# Altium PCB AMBIT-panel.PcbDoc
Units mil, origin at the board's own origin, x right, y up, seen from the top; angles counter-clockwise.
Board outline 4612.83 x 8609.74 mil, 4 copper layers (Top Layer, Ground Plane, Power Plane, Bottom Layer), stack 59.2 mil thick; 8 components, 0 nets, 12 pads, 0 vias.
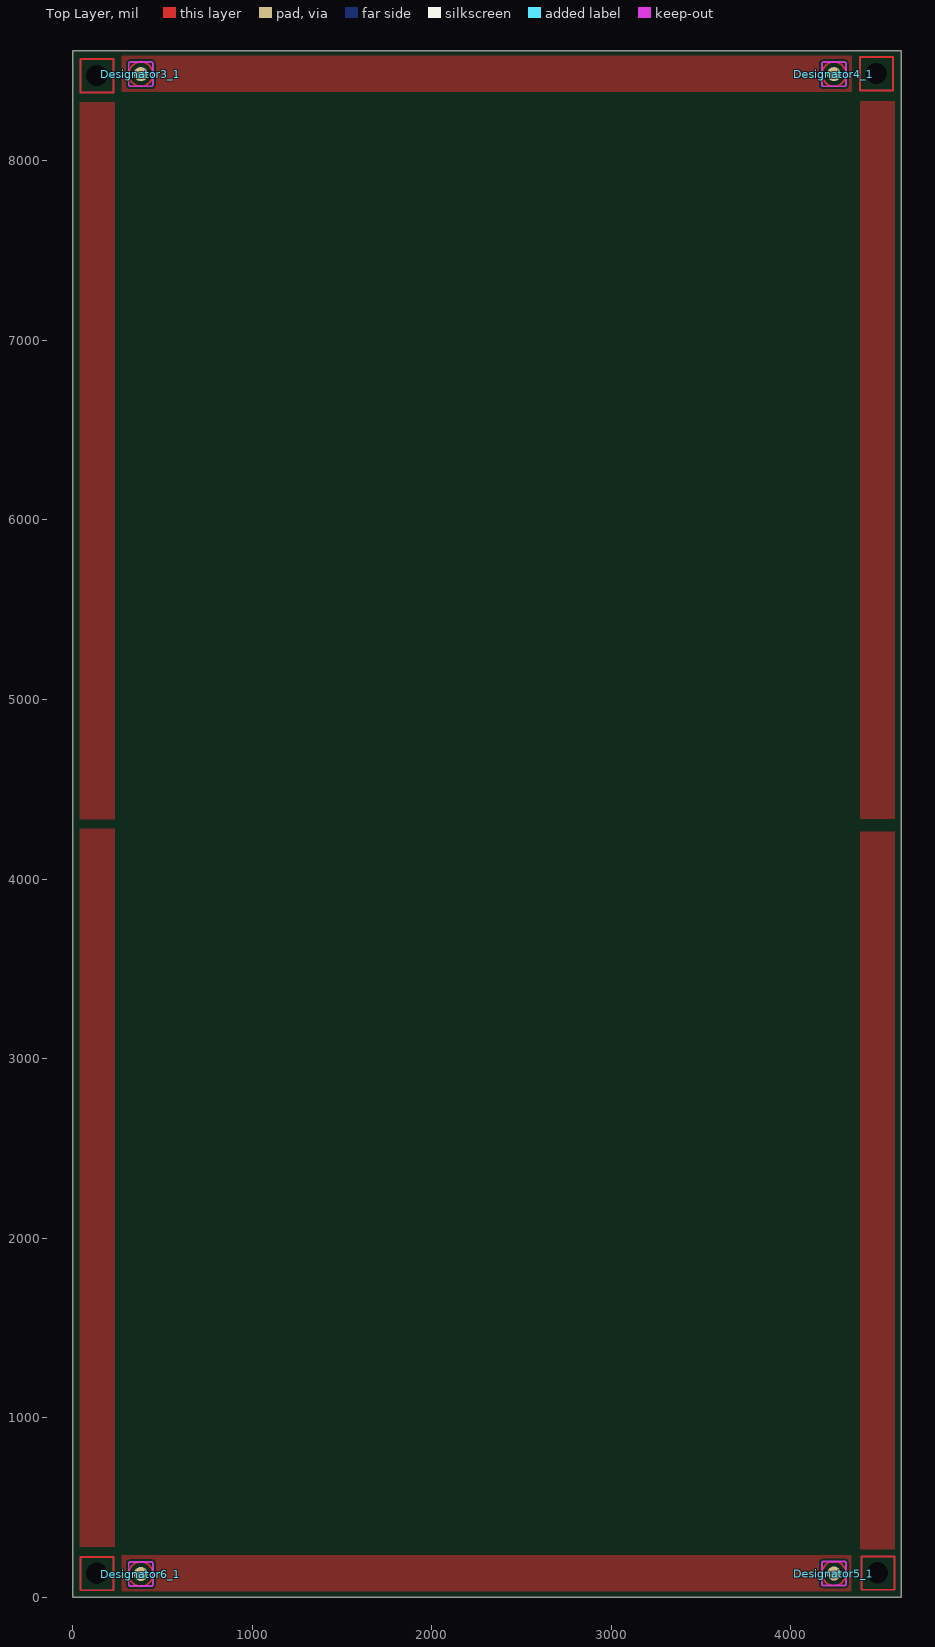
[diagram p0: Top Layer view]
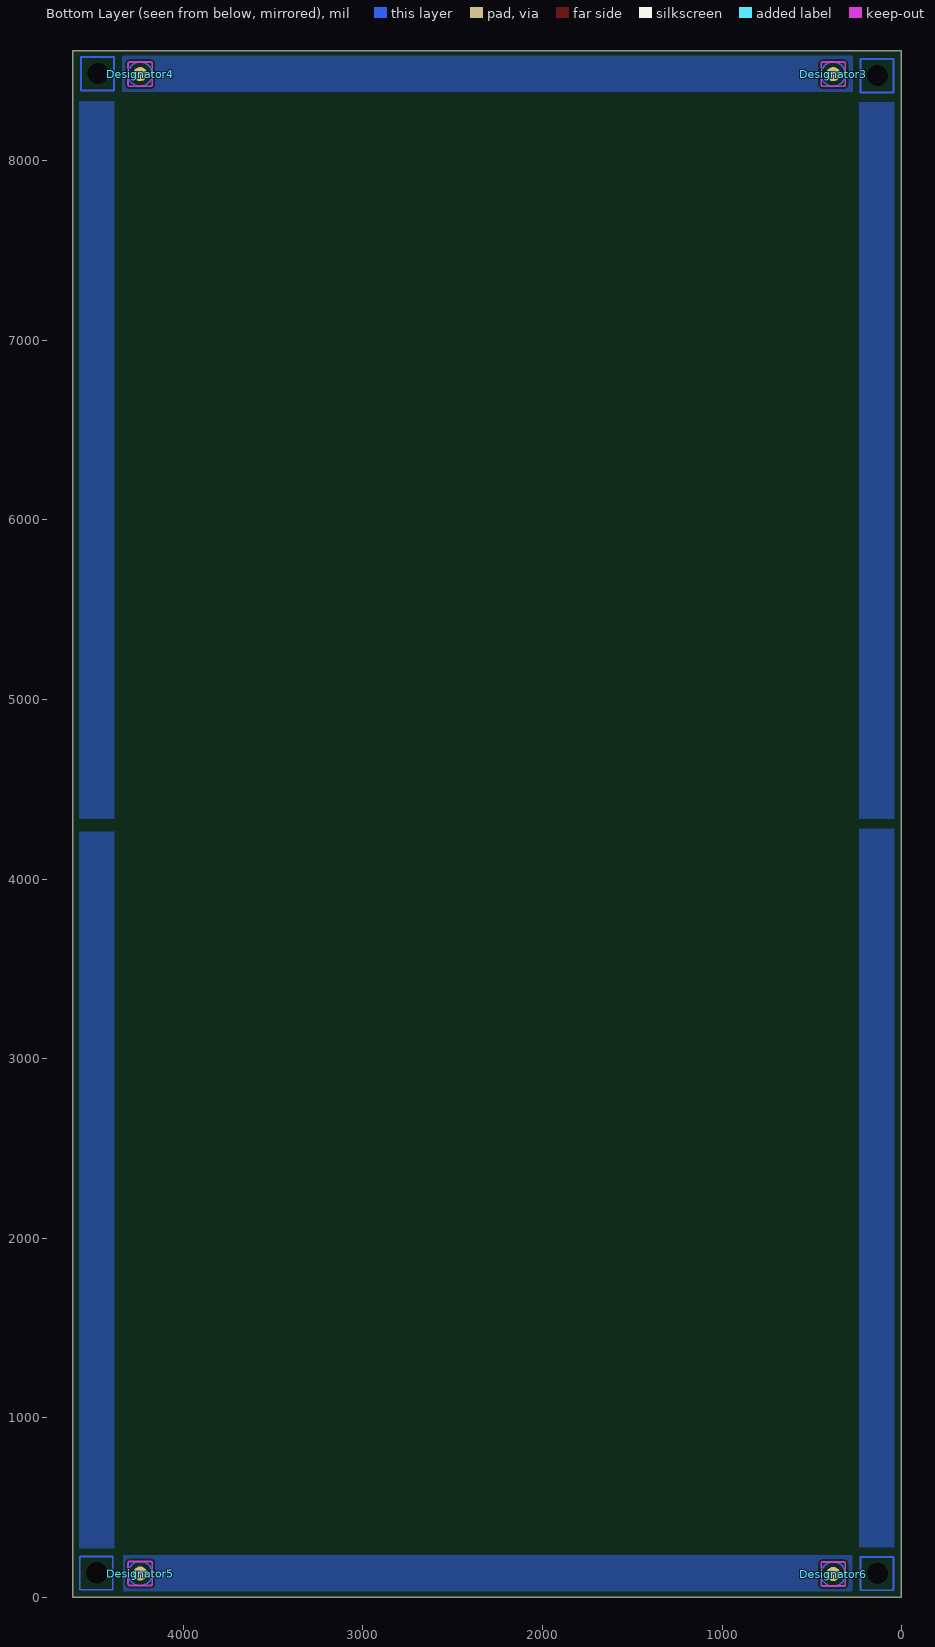
[diagram p1: Bottom Layer view, seen from below]
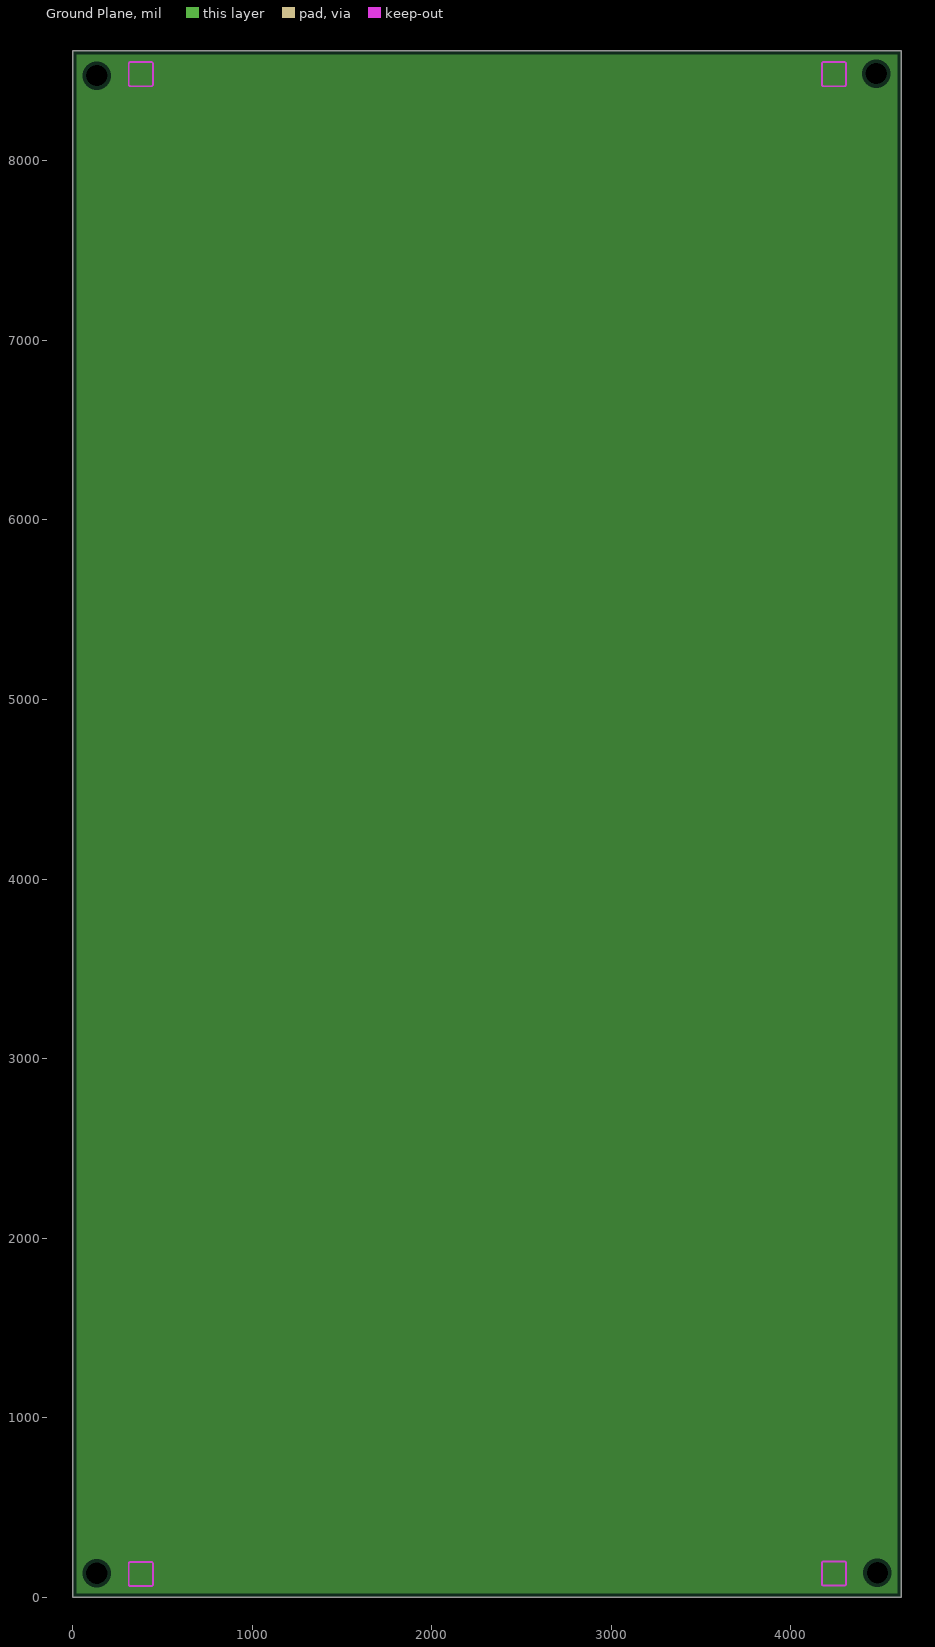
[diagram p2: Ground Plane, clearances drawn from the general rule]
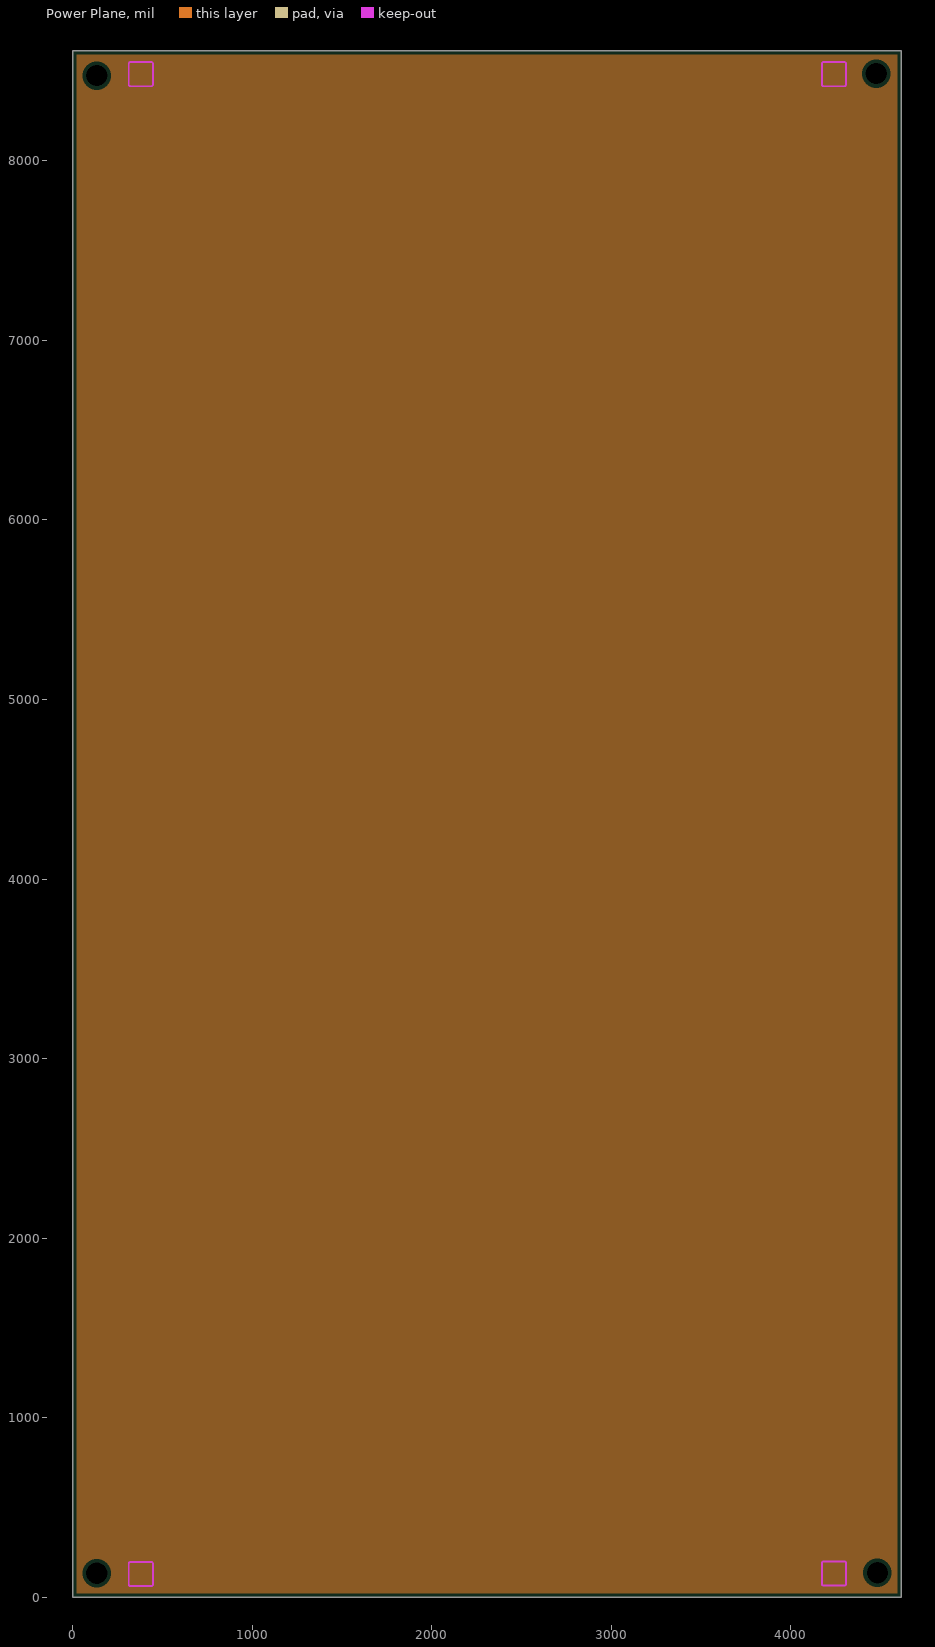
[diagram p3: Power Plane, clearances drawn from the general rule]

## Layer stack, top to bottom
Top Solder: solder mask 0.4, Solder Resist, Dk 3.5
Top Layer: signal copper 2.8
Dielectric1: prepreg 5.4, FR-4 TG170, Dk 4.6
Ground Plane: plane copper 1.4
Dielectric2: core 40, FR-4 TG170, Dk 4.6
Power Plane: plane copper 1.4
Dielectric3: prepreg 5.4, FR-4 TG170, Dk 4.6
Bottom Layer: signal copper 2.8
Bottom Solder: solder mask 0.4, Solder Resist, Dk 3.5

## Board outline
2.17,2.17 2.17,8611.91 4615,8611.91 4615,2.17

## Design rules (kind name [scope] priority, off if disabled: settings)
Clearance [All] p1: gap=10
PlaneClearance [All] p1: clearance=20
PlaneConnect [All] p1: planeconnectstyle=Relief reliefexpansion=20 reliefentries=4 reliefconductorwidth=10 reliefairgap=10
PolygonConnect [All] p1: connectstyle=Relief reliefconductorwidth=10 reliefentries=4 polygonreliefangle="90 Angle" airgapwidth=10
RoutingVias [All] p1: holewidth=28 width=50 viastyle="Through Hole" minholewidth=28 minwidth=50 maxholewidth=28 maxwidth=50
SolderMaskExpansion [All] p1: expansion=4
Width [All] p1: maxlimit=10 minlimit=7 preferedwidth=10 minimp=50.000000 maximp=50.000000 favimp=50.000000
28 further rules are at their usual default settings.

## Components (designator, comment, footprint, x,y, rotation, side; value= is the part's Value field where it differs from the comment)
Designator3 "Comment" FIDUCIAL-2X3-PANEL 381.1,8481.91 r90 bottom
Designator3_1 "Comment" FIDUCIAL-2X3-PANEL 381.1,8481.91 r90 top
Designator4 "Comment" FIDUCIAL-2X3-PANEL 4239.96,8481.91 r90 bottom
Designator4_1 "Comment" FIDUCIAL-2X3-PANEL 4239.96,8481.91 r90 top
Designator5 "Comment" FIDUCIAL-2X3-PANEL 4239.96,134.06 r90 bottom
Designator5_1 "Comment" FIDUCIAL-2X3-PANEL 4239.96,134.06 r90 top
Designator6 "Comment" FIDUCIAL-2X3-PANEL 381.1,131.1 r90 bottom
Designator6_1 "Comment" FIDUCIAL-2X3-PANEL 381.1,131.1 r90 top

## Footprints (in the part's own frame and the unit in brackets; to place one, negate y for a bottom-side part, rotate by r counter-clockwise, add the part's x,y. Pads: shape width x height; smd on the part's side, far side on the other; paste and mask are expansions set on the pad)
FIDUCIAL-2X3-PANEL [mm]
  rrect100% 2x2 smd paste+0 mask+0.508: 1(0,0)
  Top Layer circle w0.178: c0,0 r1.7
  Keep-Out Layer region: -1.5,-1.7 -1.577,-1.685 -1.641,-1.641 -1.685,-1.577 -1.7,-1.5 -1.7,-1.5 -1.7,1.5 -1.685,1.577 -1.641,1.641 -1.577,1.685 -1.5,1.7 -1.5,1.7 1.5,1.7 1.577,1.685 1.641,1.641 1.685,1.577 1.7,1.5 1.7,1.5 1.7,-1.5 1.685,-1.577 1.641,-1.641 1.577,-1.685 1.5,-1.7 1.5,-1.7
  Keep-Out Layer lines w0.254: -1.5,-1.7 cw(c-1.5,-1.5) -1.7,-1.5 -1.7,1.5 cw(c-1.5,1.5) -1.5,1.7 1.5,1.7 cw(c1.5,1.5) 1.7,1.5 1.7,-1.5 cw(c1.5,-1.5) 1.5,-1.7 -1.5,-1.7
  body extent -1.02,-1.02 1.02,1.02, height 0.02

## Free pads (board coordinates)
  round 0 hole 118.11 unplated paste-3897.64 mask-4.02: 0(135.04,135.04) 1(4482.09,137.99) 2(4475,8485) 3(135.04,8473.91)

## Nets (pads, with @x,y where several pads share a name; then routed paths per layer and width w, separated by ;. In a path a pad name is that pad's centre, name@x,y a point inside that pad or via, vN(x,y) a via of type N, cw(c..) or ccw(c..) an arc to the next point about the centre after c; other vN are vias at no path point)
pads on no net: Designator3.1 Designator3_1.1 Designator4.1 Designator4_1.1 Designator5.1 Designator5_1.1 Designator6.1 Designator6_1.1
copper on no net: | length 5922.1
  Top Layer w10: 45.47,40.55 229.53,40.55 229.53,226.57 45.47,226.57 45.47,40.55 ; 45.47,8379.43 45.47,8565.45 229.53,8565.45 229.53,8379.43 45.47,8379.43 ; 4385,8390.51 4569.49,8390.51 4569.49,8576.54 4385,8576.54 4385,8390.51 ; 4392.52,43.5 4576.58,43.5 4576.58,229.53 4392.52,229.53 4392.52,43.5
  Bottom Layer w10: 45.47,40.55 229.53,40.55 229.53,226.57 45.47,226.57 45.47,40.55 ; 45.47,8379.43 229.53,8379.43 229.53,8565.45 45.47,8565.45 45.47,8379.43 ; 4385.43,8390.51 4569.49,8390.51 4569.49,8576.54 4385.43,8576.54 4385.43,8390.51 ; 4392.52,43.5 4392.52,229.53 4576.58,229.53 4576.58,43.5 4392.52,43.5

## Polygon pours and split planes (outlines as drawn)
no net on Top Layer "Frame-Copper" (solid, pour order 44): 4578.9,8330 4578.9,4335 4627.13,4335 4385,4335 4385,8330
no net on Top Layer "Frame-Copper" (solid, pour order 45): 4578.9,4265 4578.9,270 4627.13,270 4385,270 4385,4265
no net on Top Layer "Frame-Copper" (solid, pour order 47): 235,4280 235,281.72 283.23,281.72 41.1,281.72 41.1,4280
no net on Top Layer "Frame-Copper" (solid, pour order 39): 273.53,8384.61 4340,8384.61 4340,8584.41 273.53,8584.41
no net on Top Layer "Frame-Copper" (solid, pour order 41): 275.79,35.63 4335,35.63 4335,235.43 275.79,235.43
no net on Top Layer "Frame-Copper" (solid, pour order 49): 234.95,8325 234.95,4334 283.18,4334 41.05,4334 41.05,8325
no net on Bottom Layer "Frame-Copper" (solid, pour order 42): 4578.9,4265 4578.9,274 4627.13,274 4385,274 4385,4265
no net on Bottom Layer "Frame-Copper" (solid, pour order 43): 4578.9,8330 4578.9,4335 4627.13,4335 4385,4335 4385,8330
no net on Bottom Layer "Frame-Copper" (solid, pour order 38): 273.37,8383.66 4340,8383.66 4340,8583.46 273.37,8583.46
no net on Bottom Layer "Frame-Copper" (solid, pour order 48): 235,8325 235,4335 283.23,4335 41.1,4335 41.1,8325
no net on Bottom Layer "Frame-Copper" (solid, pour order 46): 235,4280 235,279.72 283.23,279.72 41.1,279.72 41.1,4280
no net on Bottom Layer "Frame-Copper" (solid, pour order 40): 275.79,35.63 4335,35.63 4335,235.43 275.79,235.43
no net on Ground Plane (split plane): 4594.9,22.26 22.26,22.26 22.26,8591.81 4594.9,8591.81
no net on Power Plane (split plane): 4594.9,22.26 22.26,22.26 22.26,8591.81 4594.9,8591.81

## Silkscreen, mask and mechanical layers (free items; w line width, h text height)
Mechanical 2:
  drawing of 295 lines, arcs and shapes, not listed
  text "NOTES (UNLESS SPECIFIED OTHERWISE)" at 5501.57,8456.57 h80
  text "1. FABRICATE PCB IN ACCORDANCE WITH IPC-A-600 CLASS 2 (LATEST REVISION)" at 5600,8161.3 h80
  text "2. THE PCB MUST BE LEAD FREE ASSEMBLY PROCESS COMPATIBLE." at 5600,7866.02 h80
  text "MUST HANDLE MINIMUM 6 CYCLES - 260C FOR 10 SECONDS." at 5795,7710 h80
  text "3. LAMINATE AND PREPREG TO BE FR4 TG170" at 5600,7472.32 h80
  text "4. PLATING FINISH - BOTH SIDES ENIG GOLD PLATED" at 5600,7177.05 h80
  text "5. SOLDERMASK - BOTH SIDES GREEN" at 5600,6881.77 h80
  text "6. SOLDER SAMPLES TO BE PROVIDED" at 5600,6586.5 h80
  text "7. FINISHED PCB MUST BE MANELIZED FOR ASSEMBLY." at 5600,6291.22 h80
  text "8. SILKSCREEN - WHITE EPOXY INK, BOTH SIDES. NO SILK ON PADS" at 5600,6005.39 h80
  text "9. SUPPLIER MARKING - ON SOLDER SIDE" at 5600,5710.12 h80
  text "ADD ROHS LOGO" at 5796.85,5513.27 h80
  text "ADD UL MARKING AND ID" at 5796.85,5316.42 h80
  text "10. LAYER STACKUP - SEE DETAIL A" at 5600,5021.14 h80
  text "DETAIL A" at 5550,4415 h90
  text "File" at 5730,4265 h60
  text "Layer" at 6030,4265 h60
  text "Name" at 6439.91,4265 h60
  text "Material" at 7369.66,4265 h60
  text "Thickness" at 8229.42,4265 h60
  text "Constant" at 8879.26,4265 h60
  text "Board Layer Stack" at 9449.12,4265 h60
  text "1" at 6030,4145 h60
  text "Top Overlay" at 6439.91,4145 h60
  text "GTO" at 5739.8,4131.26 h60
  text "2" at 6030,4025 h60
  text "Top Solder" at 6439.91,4025 h60
  text "Solder Resist" at 7369.66,4025 h60
  text "0.010mm" at 8229.42,4025 h60
  text "3.5" at 8879.26,4025 h60
  text "GTS" at 5739.8,4011.26 h60
  text "3" at 6030,3905 h60
  text "Top Layer" at 6439.91,3905 h60
  text "Copper" at 7369.66,3905 h60
  text "0.071mm" at 8229.42,3905 h60
  text "GTL" at 5739.8,3891.26 h60
  text "4" at 6030,3785 h60
  text "Dielectric1" at 6439.91,3785 h60
  text "FR-4 TG170" at 7369.66,3785 h60
  text "0.137mm" at 8229.42,3785 h60
  text "4.6" at 8879.26,3785 h60
  text "5" at 6030,3665 h60
  text "Ground Plane" at 6439.91,3665 h60
  text "Copper" at 7369.66,3665 h60
  text "0.036mm" at 8229.42,3665 h60
  text "GP1" at 5739.8,3651.26 h60
  text "6" at 6030,3545 h60
  text "Dielectric2" at 6439.91,3545 h60
  text "FR-4 TG170" at 7369.66,3545 h60
  text "1.016mm" at 8229.42,3545 h60
  text "4.6" at 8879.26,3545 h60
  text "7" at 6030,3425 h60
  text "Power Plane" at 6439.91,3425 h60
  text "Copper" at 7369.66,3425 h60
  text "0.036mm" at 8229.42,3425 h60
  text "GP2" at 5739.8,3411.26 h60
  text "8" at 6030,3305 h60
  text "Dielectric3" at 6439.91,3305 h60
  text "FR-4 TG170" at 7369.66,3305 h60
  text "0.137mm" at 8229.42,3305 h60
  text "4.6" at 8879.26,3305 h60
  text "GBL" at 5739.8,3191.26 h60
  text "9" at 6030,3185 h60
  text "Bottom Layer" at 6439.91,3185 h60
  text "Copper" at 7369.66,3185 h60
  text "0.071mm" at 8229.42,3185 h60
  text "10" at 6030,3065 h60
  text "Bottom Solder" at 6439.91,3065 h60
  text "Solder Resist" at 7369.66,3065 h60
  text "0.010mm" at 8229.42,3065 h60
  text "3.5" at 8879.26,3065 h60
  text "GBS" at 5739.8,3051.26 h60
  text "11" at 6030,2945 h60
  text "Bottom Overlay" at 6439.91,2945 h60
Drill Drawing:
  drawing of 182 lines, arcs and shapes, not listed
  text "Symbol" at 5766.88,2550 h72
  text "Hit Count" at 6272.75,2550 h72
  text "Finished Hole Size" at 6970.56,2550 h72
  text "Plated" at 8316.17,2550 h72
  text "Hole Type" at 8822.04,2550 h72
  text "2" at 6272.75,2400 h60
  text "0.559mm (22.00mil)" at 6970.56,2400 h60
  text "PTH" at 8316.17,2400 h60
  text "Round" at 8822.04,2400 h60
  text "4" at 6272.75,2250 h60
  text "0.762mm (30.00mil)" at 6970.56,2250 h60
  text "PTH" at 8316.17,2250 h60
  text "Round" at 8822.04,2250 h60
  text "4" at 6272.75,2100 h60
  text "1.499mm (59.00mil)" at 6970.56,2100 h60
  text "PTH" at 8316.17,2100 h60
  text "Round" at 8822.04,2100 h60
  text "4" at 6272.75,1950 h60
  text "2.210mm (87.00mil)" at 6970.56,1950 h60
  text "PTH" at 8316.17,1950 h60
  text "Round" at 8822.04,1950 h60
  text "6" at 6272.75,1800 h60
  text "0.508mm (20.00mil)" at 6970.56,1800 h60
  text "PTH" at 8316.17,1800 h60
  text "Round" at 8822.04,1800 h60
  text "6" at 6272.75,1650 h60
  text "3.300mm (129.92mil)" at 6970.56,1650 h60
  text "NPTH" at 8316.17,1650 h60
  text "Round" at 8822.04,1650 h60
  text "8" at 6272.75,1500 h60
  text "0.254mm (10.00mil)" at 6970.56,1500 h60
  text "PTH" at 8316.17,1500 h60
  text "Round" at 8822.04,1500 h60
  text "8" at 6272.75,1350 h60
  text "0.965mm (38.00mil)" at 6970.56,1350 h60
  text "PTH" at 8316.17,1350 h60
  text "Round" at 8822.04,1350 h60
  text "12" at 6272.75,1200 h60
  text "3.000mm (118.11mil)" at 6970.56,1200 h60
  text "NPTH" at 8316.17,1200 h60
  text "Round" at 8822.04,1200 h60
  text "14" at 6272.75,1050 h60
  text "0.610mm (24.00mil)" at 6970.56,1050 h60
  text "PTH" at 8316.17,1050 h60
  text "Round" at 8822.04,1050 h60
  text "24" at 6272.75,900 h60
  text "1.600mm (63.00mil)" at 6970.56,900 h60
  text "PTH" at 8316.17,900 h60
  text "Round" at 8822.04,900 h60
  text "32" at 6272.75,750 h60
  text "1.397mm (55.00mil)" at 6970.56,750 h60
  text "PTH" at 8316.17,750 h60
  text "Round" at 8822.04,750 h60
  text "104" at 6272.75,600 h60
  text "0.900mm (35.43mil)" at 6970.56,600 h60
  text "PTH" at 8316.17,600 h60
  text "Round" at 8822.04,600 h60
  text "126" at 6272.75,450 h60
  text "1.016mm (40.00mil)" at 6970.56,450 h60
  text "PTH" at 8316.17,450 h60
  text "Round" at 8822.04,450 h60
  text "2514" at 6272.75,300 h60
  text "0.381mm (15.00mil)" at 6970.56,300 h60
  text "PTH" at 8316.17,300 h60
  text "Round" at 8822.04,300 h60
  text "2868 Total" at 6272.75,150 h60
Panel Dimension:
  lines w10: 2,2 2,6124.05 ; 2.17,2.17 2.17,8611.91 4615,8611.91 4615,2.17 2.17,2.17
V-Score:
  lines w10: -2,4306.1 4616,4306.1 ; 2.17,256.1 4611.02,256.1 ; 9.12,8356.1 4615.02,8356.1 ; 252.17,6.1 252.17,8615 ; 4360.04,-1.85 4360.04,8610

## Panel: embedded boards
"..\AMBIT.PcbDoc" at 256.1,256.1, 2 rows x 1 columns, spacing 4050 x 4100, rotation 0